# Altium PCB PCB_two.~.PcbDoc
Units mil, origin at the board's own origin, x right, y up, seen from the top; angles counter-clockwise.
Board outline 3797.05 x 3495.07 mil, 2 copper layers (Top Layer, Bottom Layer); 73 components, 67 nets, 352 pads, 28 vias.
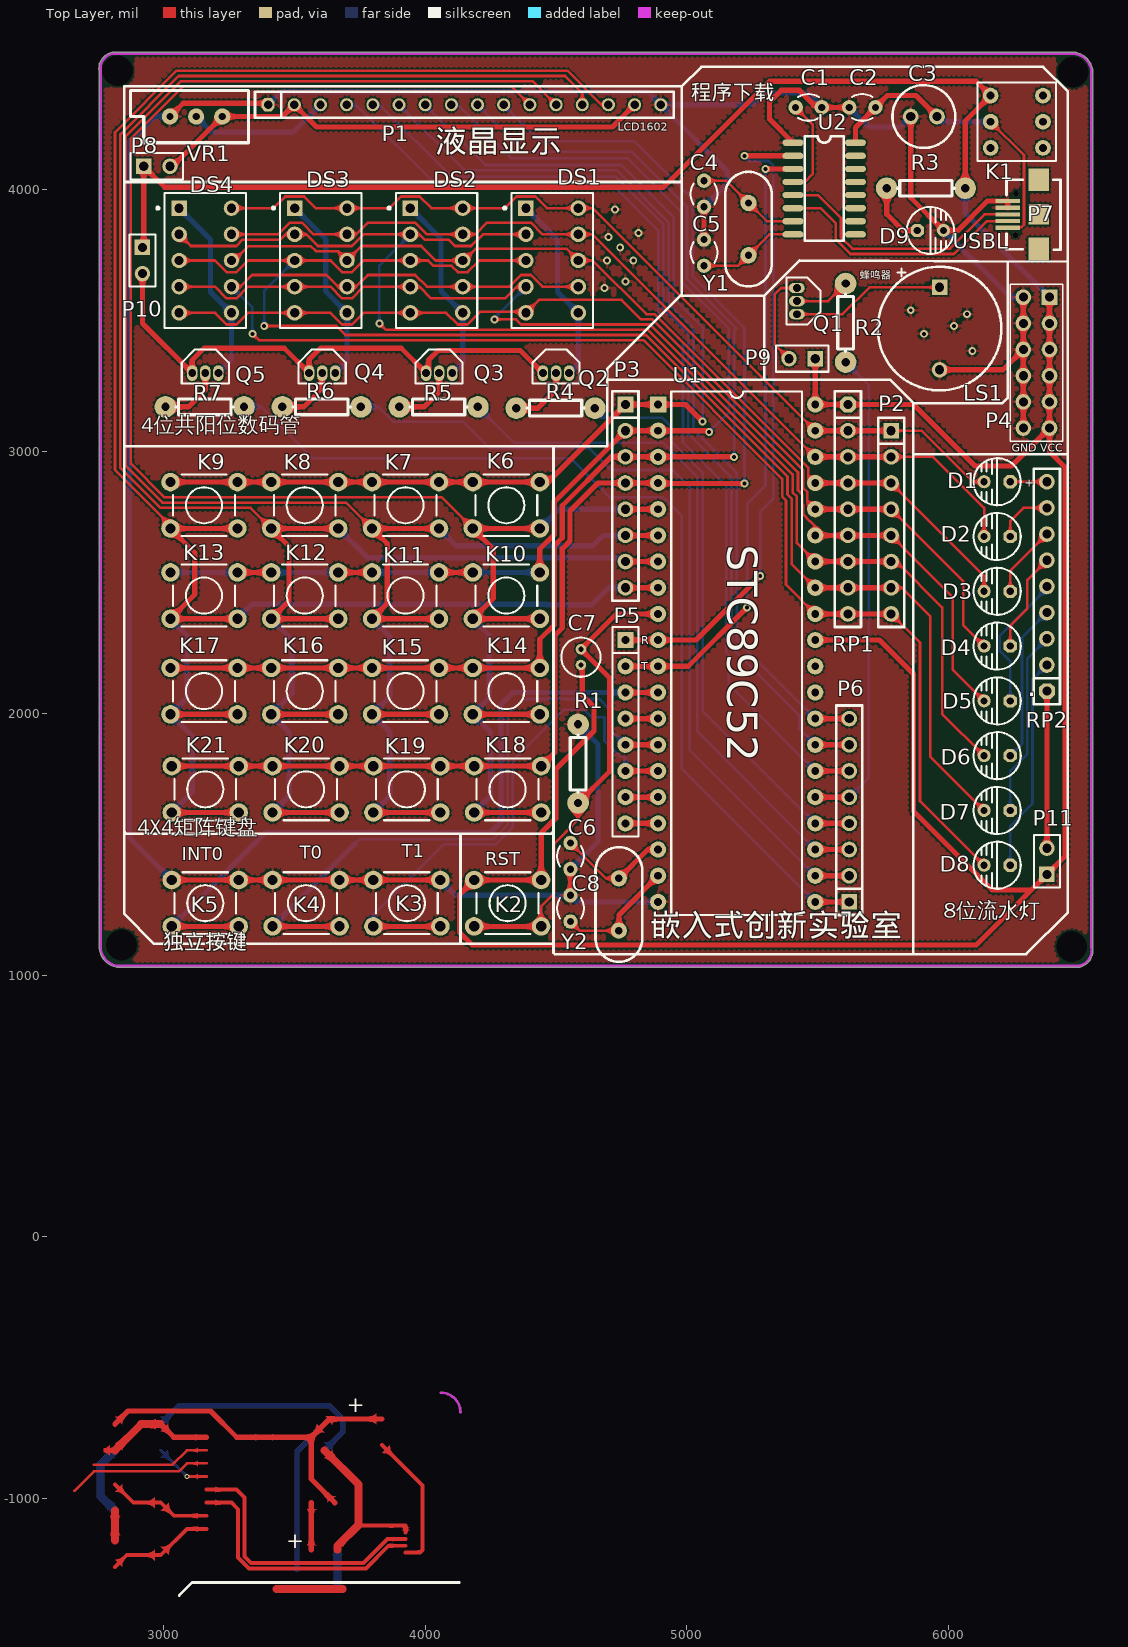
[diagram p0: Top Layer view]
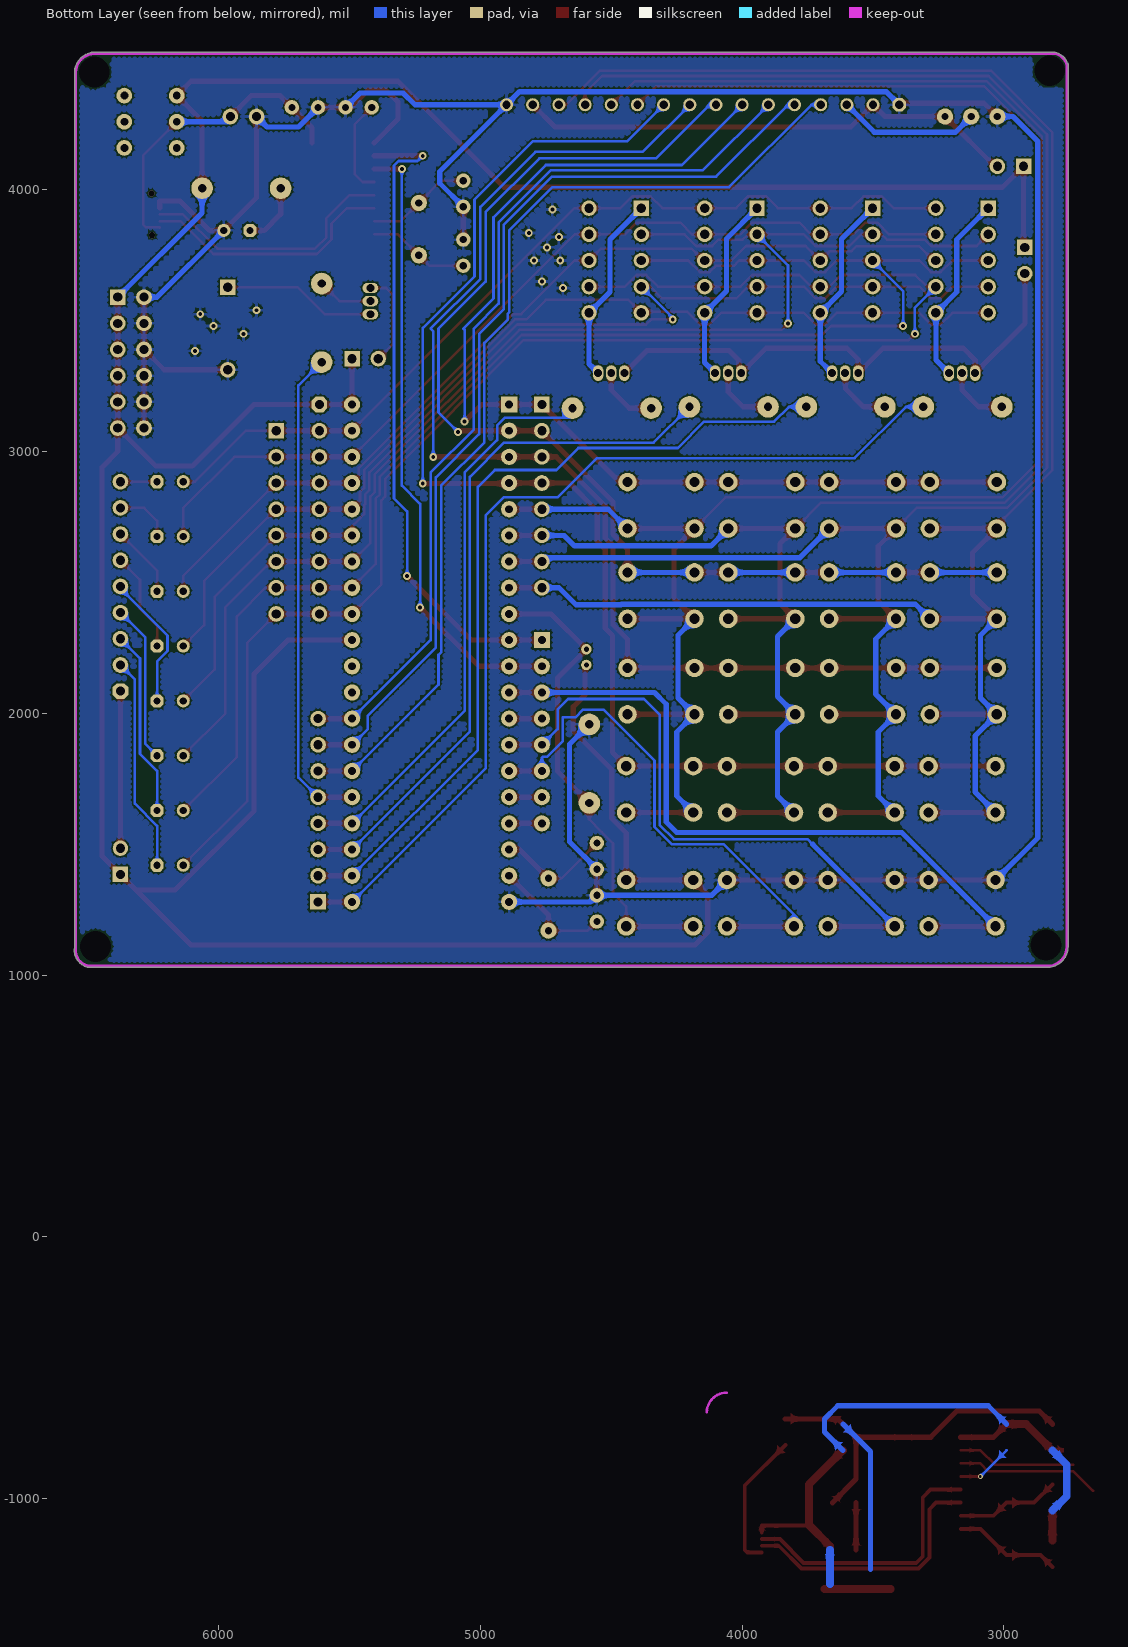
[diagram p1: Bottom Layer view, seen from below]

## Layer stack, top to bottom
Top Solder: solder mask 0.4, Solder Resist, Dk 3.5
Top Layer: signal copper 1.4
Dielectric 1: dielectric 12.6, FR-4, Dk 4.8
Bottom Layer: signal copper 1.4
Bottom Solder: solder mask 0.4, Solder Resist, Dk 3.5

## Board outline
2754.99,1115.16 2754.99,4449.47 cw(c2817.5,4462.5) 2754.99,4475.53 2754.99,4480 cw(c2760,4480) 2757.49,4484.34 cw(c2817.5,4462.5) 2803.93,4524.9 cw(c2805,4520) 2805,4525.02 6469.91,4525.02 cw(c6472.5,4447.5) 6475.09,4525.02 6485,4525.02 cw(c6485,4520) 6488.74,4523.34 cw(c6472.5,4447.5) 6548.34,4463.74 cw(c6545,4460) 6550.02,4460 6550.02,1105.41 cw(c6485,1095) 6550.84,1095 cw(c6485,1095) 6495.82,1030.05 cw(c6495,1035) 6495,1029.98 2830,1029.98 2830,1029.99 cw(c2830,1035) 2829.67,1030 cw(c2835,1110)

## Design rules (kind name [scope] priority, off if disabled: settings)
Clearance [All] p1: gap=6
PolygonConnect [All] p1: connectstyle=Relief reliefconductorwidth=10 reliefentries=4 polygonreliefangle="90 Angle" airgapwidth=10
RoutingVias [All] p1: holewidth=28 width=50 viastyle="Through Hole" minholewidth=28 minwidth=50 maxholewidth=28 maxwidth=50
SolderMaskExpansion [All] p1: expansion=4
Width [All] p1: maxlimit=20 minlimit=10 preferedwidth=20
30 further rules are at their usual default settings.

## Components (designator, comment, footprint, x,y, rotation, side; value= is the part's Value field where it differs from the comment)
C1 "103" C-RAD 5465,4315 r0 top
C2 "104" C-RAD 5670,4315 r0 top
C3 "Cap Pol" CAP_100uF 5905,4280 r180 top
C4 "22pF" C-RAD 5065,3985 r90 top
C5 "22pF" C-RAD 5065,3760 r270 top
C6 "30pF" C-RAD 4555,1455 r90 top
C7 "Cap Pol" CAP_10uF 4595,2215 r90 top
C8 "30pF" C-RAD 4555,1255 r270 top
D1 "LED0" LED3 6235,2885 r180 top
D2 "LED0" LED3 6235,2675.71 r180 top
D3 "LED0" LED3 6235,2466.43 r180 top
D4 "LED0" LED3 6235,2257.14 r180 top
D5 "LED0" LED3 6235,2047.86 r180 top
D6 "LED0" LED3 6235,1838.57 r180 top
D7 "LED0" LED3 6235,1629.29 r180 top
D8 "LED0" LED3 6235,1420 r180 top
D9 "LED0" LED3 5880,3845 r0 top
DS1 "Dpy Red-CA" A 4485,3730 r0 top
DS2 "Dpy Red-CA" A 4043.33,3730 r0 top
DS3 "Dpy Red-CA" A 3601.67,3730 r0 top
DS4 "Dpy Red-CA" A 3160,3730 r0 top
K1 "Switch1" KEY-6 6160,4360 r0 top
K2 "Switch1" "SW_PB - 6.5x4.5" 4315,1275 r180 top
K3 "Switch1" "SW_PB - 6.5x4.5" 3930,1275 r180 top
K4 "Switch1" "SW_PB - 6.5x4.5" 3545,1275 r180 top
K5 "Switch1" "SW_PB - 6.5x4.5" 3160,1275 r180 top
K6 "Switch1" "SW_PB - 6.5x4.5" 4310,2795 r180 top
K7 "Switch1" "SW_PB - 6.5x4.5" 3925,2795 r180 top
K8 "Switch1" "SW_PB - 6.5x4.5" 3540,2795 r180 top
K9 "Switch1" "SW_PB - 6.5x4.5" 3155,2795 r180 top
K10 "Switch1" "SW_PB - 6.5x4.5" 4310,2450 r180 top
K11 "Switch1" "SW_PB - 6.5x4.5" 3925,2450 r180 top
K12 "Switch1" "SW_PB - 6.5x4.5" 3540,2450 r180 top
K13 "Switch1" "SW_PB - 6.5x4.5" 3155,2450 r180 top
K14 "Switch1" "SW_PB - 6.5x4.5" 4310,2085 r180 top
K15 "Switch1" "SW_PB - 6.5x4.5" 3925,2085 r180 top
K16 "Switch1" "SW_PB - 6.5x4.5" 3540,2085 r180 top
K17 "Switch1" "SW_PB - 6.5x4.5" 3155,2085 r180 top
K18 "Switch1" "SW_PB - 6.5x4.5" 4315,1710 r180 top
K19 "Switch1" "SW_PB - 6.5x4.5" 3930,1710 r180 top
K20 "Switch1" "SW_PB - 6.5x4.5" 3545,1710 r180 top
K21 "Switch1" "SW_PB - 6.5x4.5" 3160,1710 r180 top
LS1 "SPEAKER" Beep 5965,3470 r270 top
P1 "" SIP16 3400,4325 r0 top
P2 "Header 8" "SIP8 - duplicate" 5780,3080 r270 top
P3 "Header 8" "SIP8 - duplicate" 4765,3180 r270 top
P4 "ExtendBT" HDR2x6 6385,3590 r270 top
P5 "Header 8" SIP8 4765,2280 r270 top
P6 "Header 8" "SIP8 - duplicate" 5620,1280 r90 top
P7 "MircoUSB" MircoUSB 6235,3855 r0 top
P8 "Header 2" HDR2X1_A 2925,4090 r0 top
P9 "Header 2" HDR2X1_A 5490,3355 r180 top
P10 "Header 2" HDR2X1_A 2920,3780 r270 top
P11 "Header 2" HDR2X1_A 6375,1385 r90 top
Q1 "PNP" TO-92 5420,3525 r90 top
Q2 "PNP" TO-92 4550,3300 r180 top
Q3 "PNP" TO-92 4103.33,3300 r180 top
Q4 "PNP" TO-92 3656.67,3300 r180 top
Q5 "PNP" TO-92 3210,3300 r180 top
R1 "Res" Res_DIP 4580,1805 r270 top
R2 "Res" Res_DIP 5610,3495 r90 top
R3 "Res" Res_DIP 5910,4010 r180 top
R4 "Res" Res_DIP 4495,3170 r180 top
R5 "Res" Res_DIP 4048.33,3175 r180 top
R6 "Res" Res_DIP 3601.67,3175 r180 top
R7 "Res" Res_DIP 3155,3175 r180 top
RP1 "10K" "SIP9 - duplicate" 5615,3180 r270 top
RP2 "2K" "SIP9 - duplicate" 6375,2085 r90 top
U1 "STC89C52" DIP40 4890,3180 r270 top
U2 "CH340G" SOP-16 5405,4180 r0 top
VR1 "10K" VR4 3225,4280 r180 top
Y1 "XTAL" XTAL1 5235,3750 r90 top
Y2 "XTAL" XTAL1 4740,1370 r270 top

## Footprints (in the part's own frame and the unit in brackets; to place one, negate y for a bottom-side part, rotate by r counter-clockwise, add the part's x,y. Pads: shape width x height; smd on the part's side, far side on the other; paste and mask are expansions set on the pad)
A [mm]
  rect 1.5x1.5 hole 0.9: 1(-2.54,5.08)
  round 1.5 hole 0.9: 2(-2.54,2.54) 3(-2.54,0) 4(-2.54,-2.54) 5(-2.54,-5.08) 6(2.54,-5.08) 7(2.54,-2.54) 8(2.54,0) 9(2.54,2.54) 10(2.54,5.08)
  silkscreen extent -4.72,-6.55 3.95,6.55, body extent -3.95,-6.55 3.95,6.55, height 6.34
Beep [mm]
  rect 1.5x1.5 hole 0.9: 1(-4,0)
  round 1.5 hole 0.9: 2(4,0)
  silkscreen extent -6,-6 6,6
C-RAD [mm]
  round 1.4 hole 0.7: 1(-1.27,0) 2(1.27,0)
  silkscreen extent -1.02,-1.3 0.98,1.3
CAP_10uF [mil]
  round 40 hole 20: 1(-30,0) 2(30,0)
  silkscreen extent -75,-75 75,75
CAP_100uF [mil]
  round 60 hole 35: 1(-50,0) 2(50,0)
  silkscreen extent -120,-120 120,120
DIP40 [mil]
  rect 62x62 hole 30: 1(0,0)
  round 62 hole 30: 2(100,0) 3(200,0) 4(300,0) 5(400,0) 6(500,0) 7(600,0) 8(700,0) 9(800,0) 10(900,0) 11(1000,0) 12(1100,0) 13(1200,0) 14(1300,0) 15(1400,0) 16(1500,0) 17(1600,0) 18(1700,0) 19(1800,0) 20(1900,0) 21(1900,600) 22(1800,600) 23(1700,600) 24(1600,600) 25(1500,600) 26(1400,600) 27(1300,600) 28(1200,600) 29(1100,600) 30(1000,600) 31(900,600) 32(800,600) 33(700,600) 34(600,600) 35(500,600) 36(400,600) 37(300,600) 38(200,600) 39(100,600) 40(0,600)
  silkscreen extent -50,50 1950,550
HDR2X1_A [mm]
  rect 1.5x1.5 hole 0.9: 1(0,0)
  round 1.5 hole 0.9: 2(2.54,0)
  silkscreen extent -1.27,-1.27 3.81,1.27
HDR2x6 [mil]
  rect 60x60 hole 35: 1(0,0)
  round 60 hole 35: 2(100,0) 3(200,0) 4(300,0) 5(400,0) 6(500,0) 7(500,-100) 8(400,-100) 9(300,-100) 10(200,-100) 11(100,-100) 12(0,-100)
  silkscreen extent -50,-150 550,50
KEY-6 [mil]
  round 60 hole 30: 1(0,0) 2(0,-100) 3(0,-200) 4(200,-200) 5(200,-100) 6(200,0)
  silkscreen extent -50,-250 250,50
LED3 [mm]
  oct 1.27x1.27 hole 0.7: A(0,0)
  round 1.27 hole 0.7: K(2.54,0)
  silkscreen extent -1.02,-2.29 3.55,2.29
MircoUSB [mm]
  rect 2.4x0.4 smd: 1(-0.25,0) 2(-0.25,0.65) 3(-0.25,1.3) 4(-0.25,1.95) 5(-0.25,2.6)
  rect 2x2.2 smd: 6(2.75,4.65) 7(2.75,-2.05)
  rect 2x2 smd: 8(2.75,1.3)
  silkscreen extent -0.37,-2.12 4.88,4.67
Res_DIP [mm]
  round 2.1 hole 0.813: 1(-3.885,0.1) 2(3.735,0.1)
  silkscreen extent -2.84,-0.66 2.69,0.86
SIP8 [mil]
  rect 62x62 hole 30: 1(0,0)
  round 62 hole 30: 2(100,0) 3(200,0) 4(300,0) 5(400,0) 6(500,0) 7(600,0) 8(700,0)
  silkscreen extent -50,-50 750,50
"SIP8 - duplicate" [mil]
  rect 60x60 hole 35: 1(0,0)
  round 60 hole 35: 2(100,0) 3(200,0) 4(300,0) 5(400,0) 6(500,0) 7(600,0) 8(700,0)
  silkscreen extent -50,-50 750,50
"SIP9 - duplicate" [mil]
  oct 60x60 hole 35: 1(0,0)
  round 60 hole 35: 2(100,0) 3(200,0) 4(300,0) 5(400,0) 6(500,0) 7(600,0) 8(700,0) 9(800,0)
  silkscreen extent -50,-50 850,50
SIP16 [mil]
  oct 50x50 hole 32: 1(0,0)
  round 50 hole 32: 2(100,0) 3(200,0) 4(300,0) 5(400,0) 6(500,0) 7(600,0) 8(700,0) 9(800,0) 10(900,0) 11(1000,0) 12(1100,0) 13(1200,0) 14(1300,0) 15(1400,0) 16(1500,0)
  silkscreen extent -50,-50 1550,50
SOP-16 [mil]
  oval 80x24 smd: 1(0,0) 2(0,-50) 3(0,-100) 4(0,-150) 5(0,-200) 6(0,-250) 7(0,-300) 8(0,-350) 9(238.5,-350) 10(238.5,-300) 11(238.5,-250) 12(238.5,-200) 13(238.5,-150) 14(238.5,-100) 15(238.5,-50) 16(238.5,0)
  silkscreen extent 44,-375 194,25
"SW_PB - 6.5x4.5" [mm]
  round 1.8 hole 1: 1(-3.25,-2.25) 1(3.25,-2.25) 2(-3.25,2.25) 2(3.25,2.25)
  silkscreen extent -3,-3 3,3
TO-92 [mil]
  oval 40x60 hole 30: 1(0,0) 2(50,0) 3(100,0)
  silkscreen extent -40,-90 140,40
VR4 [mil]
  round 62 hole 28: 1(0,0) 2(100,0) 3(200,0)
  silkscreen extent -100,-100 350,100
XTAL1 [mil]
  round 62 hole 28: 1(0,0) 2(200,0)
  silkscreen extent -119,-89 319,89

## Part data
C1 C2 C4 C5 C6 C8: library part Cap1, "电容"
C3 C7: "极性电解电容"
D1 D2 D3 D4 D5 D6 D7 D8 D9: "发光二极管"
DS1 DS2 DS3 DS4: "7.62 mm Black Surface HER 7-Segment Display: CA, RH DP"
K1 K2 K3 K4 K5 K6 K7 K8 K9 K10 K11 K12 K13 K14 K15 K16 K17 K18 K19 K20 K21: "按键/单刀单掷开关"
P1: library part 1602, "1602液晶显示器"
P2 P3 P5 P6: "8PIN"
P4: library part "Header 6x2", "6PIN两排"
P7: library part "Header 5", "5PIN"
P8 P9 P10 P11: "接插件"
Q1 Q2 Q3 Q4 Q5: "PNP Transistor"
R1 R2 R3 R4 R5 R6 R7: "直插电阻"
RP1 RP2: library part "Res Pack2", "9PIN排阻"
U1: library part AT89C51, "C51单片机"
U2: "USB-SERIAL"
VR1: library part VR, "可变电阻器"
Y1 Y2: "晶振"

## Free pads (board coordinates)
  round 60 hole 118.11: 1(6475,4450) 2(2825,4455) 3(2840,1115) 4(6470,1110)

## Via types
v1: diameter 30, hole 15, Top Layer to Bottom Layer, 25 vias
v2: diameter 23.62, hole 23.62, Top Layer to Bottom Layer, 2 vias
v3: diameter 20, hole 10, Top Layer to Bottom Layer, 1 vias

## Nets (pads, with @x,y where several pads share a name; then routed paths per layer and width w, separated by ;. In a path a pad name is that pad's centre, name@x,y a point inside that pad or via, vN(x,y) a via of type N, cw(c..) or ccw(c..) an arc to the next point about the centre after c; other vN are vias at no path point)
+5: C2.2 C3.1 K1.2 P7.1 U2.16 | length 1181.6
  Top Layer w10: K1.2 6287.4,4132.6 6287.4,3866.5 6278.62,3857.72 6225.16,3857.72 P7.1
  Top Layer w20: U2.16 5643.5,4238.5 C2.2 5765,4360 5875,4360 C3.1
  Bottom Layer w20: C3.1 5975,4260 K1.2
D+: P7.3 U2.5 | length 1002
  Top Layer w10: U2.5 5500,3980 5588.5,3891.5 5588.5,3818.82 5632.32,3775 6005,3775 6136.18,3906.18 P7.3
D-: P7.2 U2.6 | length 980.4
  Top Layer w10: U2.6 5510,3930 5568.5,3871.5 5568.5,3810.53 5624.04,3755 6020,3755 6145.59,3880.59 P7.2
ENBELL: P9.2 Q1.3 | length 363.1
  Top Layer w10: P9.2 5335,3410 5335,3600 5360,3625 Q1.3
ENDPY: P10.2 Q2.3 Q3.3 Q4.3 Q5.3 | length 2110.9
  Top Layer w20: P10.2 2920,3490 Q5.3 3110,3350 3155,3395 3461.67,3395 Q4.3 3556.67,3351.67 3600,3395 3908.33,3395 Q3.3 4013.33,3310 4013.33,3350 4050,3386.67 4363.33,3386.67 Q2.3
ENLCD: P1.2 P1.15 P8.2 VR1.1 | length 1942.8
  Top Layer w20: P8.2 3035,4090 VR1.1 3455,4280 P1.2 3585,4240 4715,4240 P1.15
ENLED: P11.2 RP2.1 | length 600
  Top Layer w20: P11.2 RP2.1
GND: C1.2 C2.1 C3.2 C4.1 C5.1 C6.1 C8.1 D9.K K3.1 K4.1 K5.1 LS1.2 P1.1 P1.16 P4.7 P4.8 P4.9 P4.10 P4.11 P4.12 P7.4 P7.5 R1.1 U1.20 U2.1 VR1.3 | length 11849.1
  Top Layer w20: VR1.3 3076,4331 3394,4331 P1.1 ; K5.1@3032.05,1363.58 3287.95,1363.58 3417.05,1363.58 3672.95,1363.58 3802.05,1363.58 K3.1@4057.95,1363.58 ; C8.1 C6.1 ; C5.1 C4.1 ; U2.1 5315,4270 5315,4335 5360,4380 5430,4380 5495,4315 C1.2 C2.1 ; C3.2 5855,3970 D9.K 6035,3845 6147.36,3957.36 P7.5 P7.4 ; LS1.2 6207.52,3312.52 P4.10 ; P4.7 P4.8 P4.9 P4.10 ; P4.12 P4.11 P4.10
  Bottom Layer w20: VR1.3 2965.94,4280 2870.47,4184.53 2870.47,1525.16 K5.1@3032.05,1363.58 ; P1.1 3450,4375 4850,4375 P1.16 ; K3.1@4057.95,1363.58 4116.54,1305 C8.1 4580,1280 U1.20 ; C6.1 4660,1510 4660,1881.89 R1.1 ; C4.1 5155,4025 5155,4070 P1.16 ; C1.2 5460,4370 5295,4370 5250,4325 P1.16 ; C2.1 5695,4240 5815,4240 C3.2 ; D9.K 6235,3590 P4.12
  other v1: 6090,3385 5905,3450 6020,3480 6070,3525 5855,3540 4685,3625 4765,3650 4695,3730 4795,3730 4745,3780 4700,3820 4815,3835 4725,3925
NetC1_1: C1.1 U2.4 | length 369.4
  Top Layer w10: U2.4 5450,4030 5480,4060 5480,4250 C1.1
NetC4_2: C4.2 U2.7 Y1.2 | length 404.2
  Top Layer w10: C4.2 5150,4035 Y1.2 5305,3880 U2.7
NetC5_2: C5.2 U2.8 Y1.1 | length 389.7
  Top Layer w10: C5.2 5195,3710 Y1.1 5315,3830 U2.8
NetD1_A: D1.A RP2.9 | length 140
  Top Layer w10: D1.A RP2.9
NetD2_A: D2.A RP2.8 | length 220
  Top Layer w10: D2.A 6235,2735 6285,2785 RP2.8
NetD3_A: D3.A RP2.7 | length 276.6
  Top Layer w10: D3.A 6235,2545 RP2.7
NetD4_A: D4.A RP2.6 | length 385.8
  Top Layer w10: D4.A 6235,2335 6300,2400 6300,2510 RP2.6
NetD5_A: D5.A RP2.5 | length 528.3
  Bottom Layer w10: D5.A 6235,2198.43 6195,2238.43 6195,2297.14 6375,2477.14 RP2.5
NetD6_A: D6.A RP2.4 | length 604.4
  Bottom Layer w10: D6.A 6280,1883.57 6280,2290 RP2.4
NetD7_A: D7.A RP2.3 | length 713.7
  Bottom Layer w10: D7.A 6235,1779.86 6300,1844.86 6300,2210 RP2.3
NetD8_A: D8.A RP2.2 | length 823
  Bottom Layer w10: D8.A 6235,1570.57 6320,1655.57 6320,2130 RP2.2
NetD9_A: D9.A R3.2 | length 241.8
  Top Layer w20: R3.2 5762.95,3907.05 5825,3845 D9.A
NetDS1_1: DS1.1 DS1.6 Q2.1 | length 727.3
  Bottom Layer w20: DS1.1 4505,3810 4505,3610 DS1.6 4585,3335 Q2.1
NetDS2_1: DS2.1 DS2.6 Q3.1 | length 729.4
  Bottom Layer w20: DS2.1 4060,3813.33 4060,3613.33 DS2.6 4143.33,3340 Q3.1
NetDS3_1: DS3.1 DS3.6 Q4.1 | length 731.5
  Bottom Layer w20: DS3.1 3620,3811.67 3620,3611.67 DS3.6 3701.67,3345 Q4.1
NetDS4_1: DS4.1 DS4.6 Q5.1 | length 733.6
  Bottom Layer w20: DS4.1 3180,3810 3180,3610 DS4.6 3260,3350 Q5.1
NetLS1_1: LS1.1 Q1.1 | length 587.4
  Top Layer w10: Q1.1 5595,3525 5697.48,3627.48 LS1.1
NetP1_3: P1.3 VR1.2 | length 543.3
  Bottom Layer w20: VR1.2 3185,4220 3495,4220 P1.3
NetQ1_2: Q1.2 R2.2 | length 213.8
  Top Layer w10: Q1.2 5539.02,3575 R2.2
NetQ2_2: Q2.2 R4.2 | length 245.6
  Top Layer w20: R4.2 4431.06,3166.06 4500,3235 Q2.2
NetQ3_2: Q3.2 R5.2 | length 247.4
  Top Layer w20: R5.2 3996.06,3171.06 4053.33,3228.33 Q3.2
NetQ4_2: Q4.2 R6.2 | length 239.6
  Top Layer w20: R6.2 3536.06,3171.06 3605,3240 3605,3298.33 Q4.2
NetQ5_2: Q5.2 R7.2 | length 257.7
  Top Layer w20: R7.2 3096.06,3171.06 3160,3235 Q5.2
  Bottom Layer w20: Q5.2@3150,3290 Q5.2
P00: D1.K DS1.10 DS2.10 DS3.10 DS4.10 P2.1 RP1.2 U1.39 | length 3418.5
  Top Layer w10: DS4.10 3421.4,3930 3465.93,3974.53 3537.41,3974.53 3581.93,3930 DS3.10 3863.06,3930 3907.59,3974.53 3979.07,3974.53 4023.6,3930 DS2.10 4304.73,3930 4349.26,3974.53 4420.74,3974.53 4465.27,3930 DS1.10 4640,3930 U1.39 ; P2.1 5895,3080 6090,2885 D1.K
  Top Layer w20: U1.39 RP1.2 P2.1
P01: D2.K DS1.9 DS2.9 DS3.9 DS4.9 P2.2 RP1.3 U1.38 | length 3527.8
  Top Layer w10: DS4.9 3438.7,3830 3483.22,3874.53 3529.53,3874.53 3574.06,3830 DS3.9 3736.35,3830 3780.88,3874.53 3961.78,3874.53 4006.3,3830 DS2.9 4191.72,3830 4236.24,3874.53 4403.44,3874.53 4447.97,3830 DS1.9 4640,3830 U1.38 ; P2.2 5940,2980 6135,2785 D2.K
  Top Layer w20: U1.38 RP1.3 P2.2
P02: D3.K DS1.8 DS2.8 DS3.8 DS4.8 P2.3 RP1.4 U1.37 | length 3579.9
  Top Layer w10: DS4.8 3270,3730 3325,3785 3562.49,3785 3582.01,3765.47 3666.19,3765.47 DS3.8 3757.14,3785.47 3984.53,3785.47 4040,3730 DS2.8 4148.28,3730 4193.28,3775 4540,3775 DS1.8 4640,3730 4844.53,3525.47 4875.95,3525.47 5464,2937.42 5464,2906 U1.37 ; P2.3 6135,2525 D3.K
  Top Layer w20: U1.37 RP1.4 P2.3
P03: D4.K DS1.5 DS2.5 DS3.5 DS4.5 P2.4 RP1.5 U1.36 | length 3917.2
  Top Layer w10: DS4.5 3197.03,3530 3241.56,3485.47 3278.44,3485.47 3322.97,3530 DS3.5 3638.7,3530 3683.22,3485.47 3720.11,3485.47 3764.64,3530 DS2.5 4080.36,3530 4124.89,3485.47 4161.78,3485.47 4211.3,3535 4380,3535 DS1.5 4435,3580 4749.85,3580 4824.38,3505.47 4867.66,3505.47 5444,2929.14 5444,2860.95 5460,2844.95 5460,2810 U1.36 ; P2.4 6055,2505 6055,2337.14 D4.K
  Top Layer w20: U1.36 RP1.5 P2.4
P04: D5.K DS1.4 DS2.4 DS3.4 DS4.4 P2.5 RP1.6 U1.35 | length 4351.7
  Top Layer w10: DS4.4@3057.03,3630 DS4.4 3197.03,3630 3241.56,3585.47 3278.44,3585.47 3322.97,3630 DS3.4 3638.7,3630 3683.22,3585.47 3720.11,3585.47 3764.64,3630 DS2.4 3978.02,3630 4022.55,3585.47 4305.78,3585.47 4350.31,3630 DS1.4 ; v1(4265,3505) 4347.03,3505 4366.56,3485.47 4859.38,3485.47 5424,2920.85 5424,2852.66 5440,2836.66 5440,2800 5444,2796 5444,2760.95 5470.95,2734 5471,2734 5490,2715 U1.35 ; P2.5 6015,2445 6015,2167.86 D5.K
  Top Layer w20: U1.35 RP1.6 P2.5
  Bottom Layer w10: v1(4265,3505) 4265,3510 DS1.4
P05: D6.K DS1.2 DS2.2 DS3.2 DS4.2 P2.6 RP1.7 U1.34 | length 5201.2
  Top Layer w10: DS4.2 3104.53,3785.47 3278.44,3785.47 3302.97,3810 3446.98,3810 3466.98,3830 DS3.2 3545.77,3830 3590.3,3785.47 3720.11,3785.47 3764.64,3830 DS2.2 3978.02,3830 3998.02,3810 4090,3810 4114.53,3785.47 4175.47,3785.47 4220,3830 DS1.2 ; v1(3825,3490) 3849.53,3465.47 4851.1,3465.47 5404,2912.57 5404,2844.38 5420,2828.38 5420,2650 U1.34 ; P2.6 5800,2580 5975,2405 5975,1998.57 D6.K
  Top Layer w20: U1.34 RP1.7 P2.6
  Bottom Layer w10: v1(3825,3490) 3825,3711.67 DS2.2
P06: D7.K DS1.3 DS2.3 DS3.3 DS4.3 P2.7 RP1.8 U1.33 | length 5751.6
  Top Layer w10: DS4.3 3197.03,3730 3241.56,3685.47 3278.44,3685.47 3322.97,3730 DS3.3 3638.7,3730 3683.22,3685.47 3720.11,3685.47 3764.64,3730 DS2.3 4011.72,3730 4031.72,3710 4100.36,3710 4124.89,3685.47 4161.78,3685.47 4205,3728.7 4205,3730 DS1.3 ; v1(3385,3480) 3660.41,3480 3694.94,3445.47 4842.81,3445.47 5384,2904.28 5384,2836.09 5400,2820.09 5400,2570 U1.33 ; P2.7 5820,2480 5930,2370 5930,1834.29 D7.K
  Top Layer w20: U1.33 RP1.8 P2.7
  Bottom Layer w10: v1(3385,3480) 3385,3613.33 DS3.3
P07: D8.K DS1.7 DS2.7 DS3.7 DS4.7 P2.8 RP1.9 U1.32 | length 5867.5
  Top Layer w10: DS4.7 3294.69,3630 3339.21,3674.53 3622.45,3674.53 3666.98,3630 DS3.7 3736.35,3630 3780.88,3674.53 3961.78,3674.53 4006.3,3630 DS2.7 4322.03,3630 4366.56,3674.53 4403.44,3674.53 4447.97,3630 DS1.7 ; v1(3340,3450) 3364.53,3425.47 4834.53,3425.47 5364,2896 5364,2827.81 5378.36,2813.45 5378.36,2491.64 U1.32 ; P2.8 5890,2270 5890,1665 D8.K
  Top Layer w20: U1.32 RP1.9 P2.8
  Bottom Layer w10: DS4.7 3340,3550 v1(3340,3450)
P10: K6.1 K7.1 K8.1 K9.1 P1.7 P3.1 U1.1 | length 4140.5
  Top Layer w20: K9.1@3027.05,2883.58 3282.95,2883.58 3412.05,2883.58 3667.95,2883.58 3797.05,2883.58 4052.95,2883.58 4182.05,2883.58 4437.95,2883.58 4468.58,2883.58 P3.1 U1.1 4995,3180 v1(5060,3115)
  Bottom Layer w10: P1.7 4230,4095 4750,4095 4950,3895 4950,3585 5065,3470 5060,3465 v1(5060,3115)
P11: K10.1 K11.1 K12.1 K13.1 P1.8 P3.2 U1.2 | length 4405.3
  Top Layer w20: K13.1@3282.95,2538.58 K12.1@3412.05,2538.58 ; K12.1@3667.95,2538.58 K11.1@3797.05,2538.58 ; K11.1@4052.95,2538.58 K10.1@4182.05,2538.58 ; K10.1@4437.95,2538.58 4437.95,2628.02 4493.39,2683.46 4493.39,2808.39 P3.2 U1.2 5080,3080 v1(5085,3075)
  Bottom Layer w10: P1.8 4125,4325 4330,4120 4775,4120 4980,3915 4980,3650 5160,3470 5160,3150 v1(5085,3075)
  Bottom Layer w20: K13.1@3027.05,2538.58 K13.1@3282.95,2538.58 ; K12.1@3412.05,2538.58 K12.1@3667.95,2538.58 ; K11.1@3797.05,2538.58 K11.1@4052.95,2538.58 ; K10.1@4182.05,2538.58 K10.1@4437.95,2538.58
P12: K14.1 K15.1 K16.1 K17.1 P1.9 P3.3 U1.3 | length 4799.4
  Top Layer w20: K17.1@3027.05,2173.58 3282.95,2173.58 3412.05,2173.58 3667.95,2173.58 3797.05,2173.58 4052.95,2173.58 4182.05,2173.58 4437.95,2173.58 4437.95,2283.02 4493.39,2338.46 4493.39,2641.03 4523.39,2671.03 4523.39,2793.39 4710,2980 P3.3 U1.3 v1(5180,2980)
  Bottom Layer w10: P1.9 4380,4145 4790,4145 5000,3935 5000,3660 5190,3470 5180,3460 v1(5180,2980)
P13: K18.1 K19.1 K20.1 K21.1 P1.10 P3.4 U1.4 | length 5182.4
  Top Layer w20: K21.1@3032.05,1798.58 3287.95,1798.58 3417.05,1798.58 3672.95,1798.58 3802.05,1798.58 4057.95,1798.58 4187.05,1798.58 4442.95,1798.58 4495,1850.63 4495,2297.64 4523.39,2326.03 4523.39,2628.6 4553.39,2658.6 4553.39,2773.39 4660,2880 P3.4 U1.4 4892.25,2877.75 v1(5220,2877.75)
  Bottom Layer w10: P1.10 4440,4185 4800,4185 5022.44,3962.56 5022.44,3669.81 5220,3472.25 v1(5220,2877.75)
P14: K6.2 K10.2 K14.2 K18.2 P1.11 P3.5 U1.5 | length 7048.6
  Top Layer w10: K6.2@4182.05,2706.42 4063.46,2825 3005,2825 2875.47,2954.53 2875.47,4195.53 3074.95,4395 4330,4395 P1.11
  Top Layer w20: K14.2@4182.05,1996.42 K14.2@4437.95,1996.42 ; K18.2@4187.05,1621.42 K18.2@4442.95,1621.42 ; K10.2@4437.95,2361.42 4182.05,2361.42 4260,2439.37 4260,2628.46 4182.05,2706.42 K6.2@4437.95,2706.42 ; P3.5 U1.5
  Bottom Layer w20: K10.2@4182.05,2361.42 4245,2298.46 4245,2059.37 4182.05,1996.42 4250,1928.46 4250,1684.37 K18.2@4187.05,1621.42 ; K6.2@4437.95,2706.42 4511.54,2780 P3.5
P15: K7.2 K11.2 K15.2 K19.2 P1.12 P3.6 U1.6 | length 7216.1
  Top Layer w10: K7.2@3797.05,2706.42 3698.46,2805 2996.57,2805 2855.47,2946.1 2855.47,4203.81 3066.66,4415 4410,4415 P1.12
  Top Layer w20: K15.2@3797.05,1996.42 K15.2@4052.95,1996.42 ; K19.2@3802.05,1621.42 K19.2@4057.95,1621.42 ; K11.2@4052.95,2361.42 3797.05,2361.42 3855,2419.37 3855,2648.46 3797.05,2706.42 K7.2@4052.95,2706.42 ; P3.6 U1.6
  Bottom Layer w20: K11.2@3797.05,2361.42 3865,2293.46 3865,2064.37 3797.05,1996.42 3865,1928.46 3865,1684.37 K19.2@3802.05,1621.42 ; K7.2@4052.95,2706.42 4119.37,2640 4640,2640 4680,2680 P3.6
P16: K8.2 K12.2 K16.2 K20.2 P1.13 P3.7 U1.7 | length 7441
  Top Layer w10: K8.2@3412.05,2706.42 3333.46,2785 2988.28,2785 2835.47,2937.81 2835.47,4212.09 3058.38,4435 4535,4435 4600,4370 P1.13
  Top Layer w20: K16.2@3412.05,1996.42 K16.2@3667.95,1996.42 ; K20.2@3417.05,1621.42 K20.2@3672.95,1621.42 ; K12.2@3667.95,2361.42 3412.05,2361.42 3480,2429.37 3480,2638.46 3412.05,2706.42 K8.2@3667.95,2706.42 ; P3.7 U1.7
  Bottom Layer w20: K12.2@3412.05,2361.42 3490,2283.46 3490,2074.37 3412.05,1996.42 3480,1928.46 3480,1684.37 K20.2@3417.05,1621.42 ; K8.2@3667.95,2706.42 3779.37,2595 4750,2595 P3.7 P3.7@4757.57,2580
P17: K9.2 K13.2 K17.2 K21.2 P1.14 P3.8 U1.8 | length 7599.7
  Top Layer w10: K9.2@3027.05,2706.42 3027.05,2717.95 2815,2930 2815,4219.91 3050.09,4455 4543.28,4455 4673.28,4325 P1.14
  Top Layer w20: K17.2@3027.05,1996.42 K17.2@3282.95,1996.42 ; K21.2@3032.05,1621.42 K21.2@3287.95,1621.42 ; K13.2@3282.95,2361.42 3027.05,2361.42 3120,2454.37 3120,2613.46 3027.05,2706.42 K9.2@3282.95,2706.42 ; P3.8 U1.8
  Bottom Layer w20: K13.2@3027.05,2361.42 3090,2298.46 3090,2059.37 3027.05,1996.42 3110,1913.46 3110,1699.37 K21.2@3032.05,1621.42 ; K13.2@3282.95,2361.42 3338.39,2416.85 4460.91,2416.85 4462.76,2415 4635,2415 4700,2480 P3.8
P20: P6.1 R7.1 U1.21 | length 3660.7
  Top Layer w20: U1.21 P6.1
  Bottom Layer w10: R7.1 3373.94,3171.06 3570,2975 4555,2975 4704,2826 4909.05,2826 4980,2755.05 4980,1790 U1.21
P21: P6.2 R6.1 U1.22 | length 3196
  Top Layer w20: U1.22 P6.2
  Bottom Layer w10: R6.1 3821.61,3171.06 3877.95,3114.72 4144.95,3114.72 4245.67,3014 4626,3014 4710,2930 4945,2930 5010,2865 5010,1860 U1.22
P22: P6.3 R5.1 U1.23 | length 2689.2
  Top Layer w20: U1.23 P6.3
  Bottom Layer w10: R5.1 4338.35,3034 4909.05,3034 5040,2903.05 5040,1930 U1.23
P23: P6.4 R4.1 U1.24 | length 2194.3
  Top Layer w20: U1.24 P6.4
  Bottom Layer w10: R4.1 4684.02,3130 4905.05,3130 4936,3099.05 4936,3044 5060,2920 5060,2010 U1.24
P24: P6.5 R2.1 U1.25 | length 1860
  Top Layer w20: U1.25 P6.5
  Bottom Layer w10: R2.1 5695,3253.11 5695,1755 P6.5
P25: P1.4 P6.6 U1.26 | length 3832.4
  Top Layer w20: U1.26 P6.6
  Bottom Layer w10: P1.4 3735,4325 4050,4010 4725,4010 4890,3845 4890,3531.72 4895,3526.72 4895,3505 4985,3415 4985,3035 5150,2870 5150,2233.43 5160,2223.43 5160,2110 U1.26
P26: P1.5 P6.7 U1.27 | length 3656.8
  Top Layer w20: U1.27 P6.7
  Bottom Layer w10: P1.5 3825,4325 4100,4050 4726.72,4050 4910,3866.72 4910,3545 5005,3450 5005,3066.72 5170,2901.72 5170,2251.72 5430,1991.72 5430,1940 U1.27
P27: P1.6 P6.8 U1.28 | length 3473.4
  Top Layer w20: U1.28 P6.8
  Bottom Layer w10: P1.6 4150,4075 4730,4075 4930,3875 4930,3565 5025,3470 5025,3085 5190,2920 5190,2280 U1.28
P30: P5.1 U1.10 U2.2 | length 2515.2
  Top Layer w20: P5.1 U1.10 5035,2280 v1(5280,2525) ; v1(5220,4130) U2.2
  Bottom Layer w10: v1(5220,4130) 5240,4110 5312.43,4110 5330,4092.43 5330,2821.72 5280,2771.72 v1(5280,2525)
P31: P5.2 U1.11 U2.3 | length 2367.2
  Top Layer w20: P5.2 U1.11 5005,2180 v1(5230,2405) ; v1(5300,4080) U2.3
  Bottom Layer w10: v1(5230,2405) 5230,2800 5300,2870 v1(5300,4080)
P32: K5.2 P5.3 U1.12 | length 2747.6
  Top Layer w20: K5.2@3032.05,1186.42 K5.2@3287.95,1186.42 ; P5.3 U1.12
  Bottom Layer w20: K5.2@3032.05,1186.42 3390.63,1545 4250,1545 4290,1585 4290,2035 4335,2080 P5.3
P33: P5.4 U1.13 | length 125
  Top Layer w20: P5.4 U1.13
P34: K4.2 P5.5 U1.14 | length 2451.3
  Top Layer w20: K4.2@3417.05,1186.42 K4.2@3672.95,1186.42 ; P5.5 U1.14
  Bottom Layer w10: 3730.63,1500 3750.63,1520 4260.36,1520 4315,1574.64 4315,1995 4375,2055 4665,2055 4705,2015 4705,1940 P5.5
  Bottom Layer w20: K4.2@3417.05,1186.42 3730.63,1500
P35: K3.2 P5.6 U1.15 | length 2041.3
  Top Layer w20: K3.2@3802.05,1186.42 K3.2@4057.95,1186.42 ; P5.6 U1.15
  Bottom Layer w10: K3.2@3802.05,1186.42 3802.05,1232.05 4070,1500 4268.64,1500 4335,1566.36 4335,1819.29 4530,2014.29 4607.27,2014.29 4636.56,1985 4685,1985 4685,1894.95 4745.95,1834 4761.91,1834 4765,1830.91 P5.6
P36: P5.7 U1.16 | length 125
  Top Layer w20: P5.7 U1.16
P37: P5.8 U1.17 | length 125
  Top Layer w20: P5.8 U1.17
RST: C7.2 K2.2 R1.2 U1.9 | length 1819.6
  Top Layer w10: K2.2@4442.95,1186.42 4442.95,1262.72 4493.39,1313.15 4493.39,1503.57 4537.37,1547.56 4537.56,1547.56 4583.94,1593.94 R1.2
  Top Layer w20: K2.2@4187.05,1186.42 K2.2@4442.95,1186.42 ; R1.2 4705,1779.02 4705,2135 C7.2 4730,2380 U1.9
VCC: C7.1 K1.1 K2.1 P4.1 P4.2 P4.3 P4.4 P4.5 P4.6 P8.1 P9.1 P10.1 P11.1 R3.1 RP1.1 U1.31 U1.40 | length 13508.2
  Top Layer w20: P10.1 2925,3785 P8.1 3005,4010 4910,4010 5315,4415 6105,4415 K1.1 6062.95,4262.95 R3.1 ; C7.1 4600,2180 4600,2070.28 4645.28,2025 4645.28,1932.55 4498.39,1785.66 4498.39,1598.46 4442.95,1543.02 4442.95,1363.58 4187.05,1363.58 4131.61,1308.15 4131.61,1163.46 4180.07,1115 6105,1115 6315,1325 ; U1.31 5735,2280 5865,2150 5865,1626.36 6166.36,1325 6315,1325 ; P9.1 U1.40 RP1.1 5865,3180 6100,2945 6240,2945 P4.6 ; P4.1 P4.2 P4.3 P4.4 P4.5 P4.6 ; 6315,1325 P11.1 6445,1455 6445,2940 6385,3000 P4.6
  Bottom Layer w20: R3.1 6062.95,3912.05 P4.1
X1: C6.2 U1.18 Y2.1 | length 436.5
  Top Layer w10: C6.2 4690,1370 Y2.1
  Top Layer w20: Y2.1 4850,1480 U1.18
X2: C8.2 U1.19 Y2.2 | length 471.6
  Top Layer w10: C8.2 4590,1170 Y2.2
  Top Layer w20: Y2.2 4740,1230 U1.19
pads on no net: K1.3 K1.4 K1.5 K1.6 P7.6 P7.7 P7.8 U1.29 U1.30 U2.9 U2.10 U2.11 U2.12 U2.13 U2.14 U2.15
copper on no net: | length 9543.1
  Top Layer w10: 2660,-970 2735,-895 3060,-895 3090,-865 3165,-865 ; 2735,-870 3035,-870 3090,-815 3165,-815 ; v3(3090,-915) 3165,-915
  Top Layer w15: 2815,-1260 2860,-1215 2990,-1215 3090,-1115 3165,-1115 ; 2815,-945 2885,-1015 2990,-1015 3040,-1065 3165,-1065 ; 3165,-1015 3260,-1015 3285,-1040 3285,-1224.7 3326.3,-1266 3773.7,-1266 3860.29,-1179.41 3925.16,-1179.41 ; 3165,-965 3280,-965 3310,-995 3310,-1220 3335,-1245 3765,-1245 3856.18,-1153.82 3925.16,-1153.82 ; 3745,-1102.64 3925.16,-1102.64 3925.16,-1128.23 ; 3835,-795 3990,-950 3990,-1195 3980,-1205 3925.16,-1205
  Top Layer w20: 2815,-715 2865,-665 3180,-665 3280,-765 3385,-765 3565,-765 ; 2990,-715 3040,-765 3165,-765 ; 3565,-1195 3565,-1015 ; 3655,-1015 3565,-925 3565,-765 ; 3835,-695 3635,-695 3615,-715 3565,-765
  Top Layer w30: 2815,-1160 2815,-1045 ; 2815,-815 2915,-715 2990,-715 ; 3432.52,-1345 3685,-1345 ; 3615,-815 3745,-945 3745,-1100 3665,-1180 3665,-1195
  Bottom Layer w10: 2990,-815 v3(3090,-915)
  Bottom Layer w20: 2990,-715 3060,-645 3635,-645 3685,-695 3685,-745 3615,-815 ; 3510,-1270 3510,-820 3615,-715
  Bottom Layer w30: 2815,-1045 2760,-990 2760,-870 2815,-815 ; 3665,-1325 3665,-1195
  other v2: 6254.69,3826.65 6256.65,3985.71

## Polygon pours and split planes (outlines as drawn)
GND on Keep-Out Layer "Top Layer-No Net" (solid, remove dead copper): 2750,4550 2745,4545 2745,1030
GND on Top Layer "Top Layer-No Net" (hatched 90Degree grid 20 track 20, remove dead copper, pour order 5): 2750,4550 2720,4520 2720,1005 6605,1005 6615,995 6640,1020 6640,4615
GND on Bottom Layer "Top Layer-No Net" (hatched 90Degree grid 20 track 20, remove dead copper, pour order 7): 2750,4550 2750,1025 6570,1025 6570,4555

## Keep-outs
Keep-Out Layer:
  lines w10: 2760,4450 cw(c2817.5,4462.5) 2805,4520 6485,4520 ; 2760,4480 2760,1115 ccw(c2835,1110) 2830,1035 6495,1035 ccw(c6485,1095) 6545,1105 6545,4460 ; 4060,-595 cw(c4060,-670) 4135,-670 ; 6470,4520 cw(c6472.5,4447.5) 6545,4450

## Silkscreen, mask and mechanical layers (free items; w line width, h text height)
Top Overlay:
  lines w10: 2865,4030 4975,4030 4980,4035 ; 2875,4030 2850,4030 ; 3060,-1370 3110,-1320 4130,-1320 ; 4135,1120 4135,1540 ; 4490,3015 4490,1550 ; 4695,3270 4700.02,3275.02 5294.98,3275.02 ; 4975,3594.98 5294.98,3594.98 ; 5865,2990 6455,2990 ; 6225,3700 6225,3725 ; 6225,3715 6225,3205 6205,3185 5865,3185 ; 2850,1550 2850,1235 2965,1120 4490,1120 ; 2850,1550 2860,1540 4480,1540 4490,1550 ; 2850,1550 2850,3020 ; 2850,3020 2850,4030 ; 2850,3020 2865,3020 4695,3020 4695,3314.98 4980,3599.98 4980,4035 ; 2850,4030 2850,4395 4980,4395 ; 4490,1120 4490,1085 4495,1080 5865,1080 ; 4490,1120 4490,1550 ; 4980,4035 4980,4395 ; 4980,4395 5055,4470 6360,4470 6455,4375 6455,3725 ; 5295,3275 5775,3275 5865,3185 ; 5294.98,3275.02 5295,3275 ; 5294.98,3275.02 5294.98,3594.98 ; 5294.98,3594.98 5430,3730 6455,3725 ; 5865,1080 6295,1080 6455,1240 6455,2990 ; 5865,1080 5865,3185 ; 6455,2990 6455,3725
  text "程序下载" at 5015,4325 h100
  text "LCD1602" at 4735,4225 h30
  text "液晶显示" at 4040,4115 h150
  text "USBL" at 6015,3755 h100
  text "蜂鸣器" at 5660,3650 h50
  text "4位共阳位数码管" at 2915,3055 h100
  text "GND" at 6240,3000 h30
  text "VCC" at 6350,3000 h30
  text "+" at 6290,2865 h30
  text "STC89C52" at 5115,2645 h200 r270
  text "R" at 4825,2265 h30
  text "T" at 4825,2165 h30
  text "." at 6300,2065 h80
  text "4X4矩阵键盘" at 2900,1520 h100
  text "T1" at 3910,1450 h50
  text "T0" at 3520,1445 h50
  text "INT0" at 3070,1440 h50
  text "RST" at 4230,1420 h50
  text "8位流水灯" at 5980,1200 h100
  text "嵌入式创新实验室" at 4860,1120 h150
  text "独立按键" at 3000,1080 h100
  text "+" at 3700,-670 h60
  text "+" at 3470,-1190 h60